# Altium PCB PCB1.PcbDoc
Units mil, origin at the board's own origin, x right, y up, seen from the top; angles counter-clockwise.
Board outline 1720 x 1130 mil, 4 copper layers (RF, GROUND, VCC, SIGNAL), stack 23.756 mil thick; 12 components, 10 nets, 55 pads, 17 vias.
Unrouted connection lines stored in the file: 18.
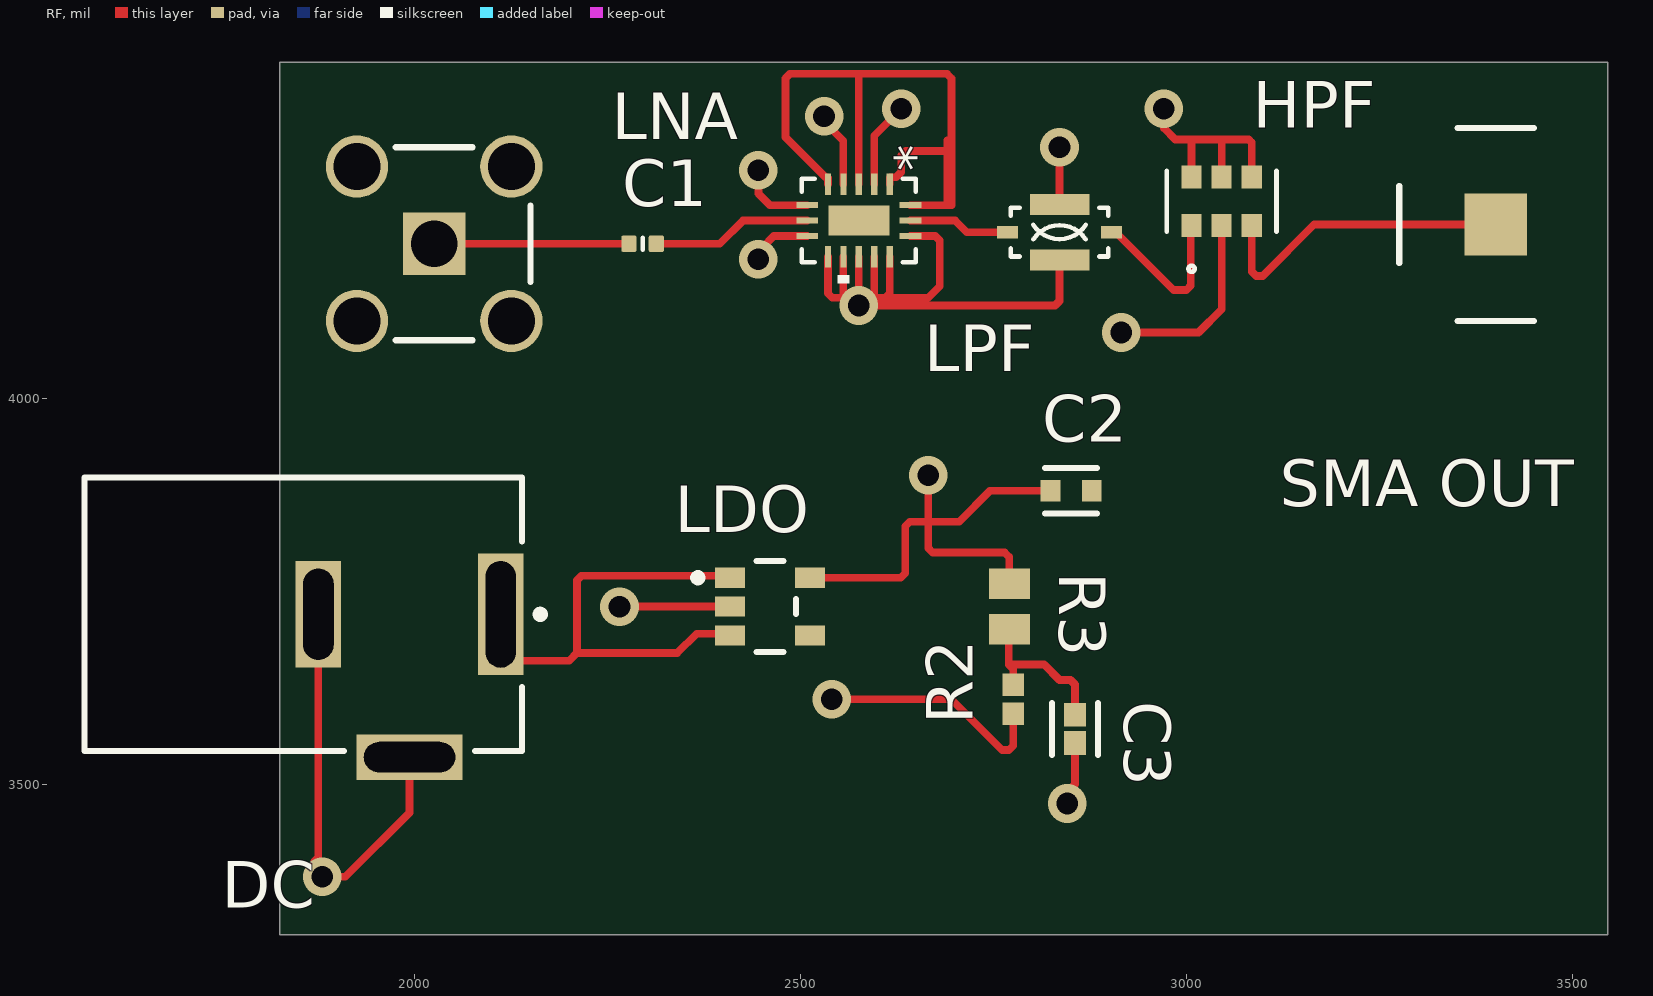
[diagram p0: RF view]
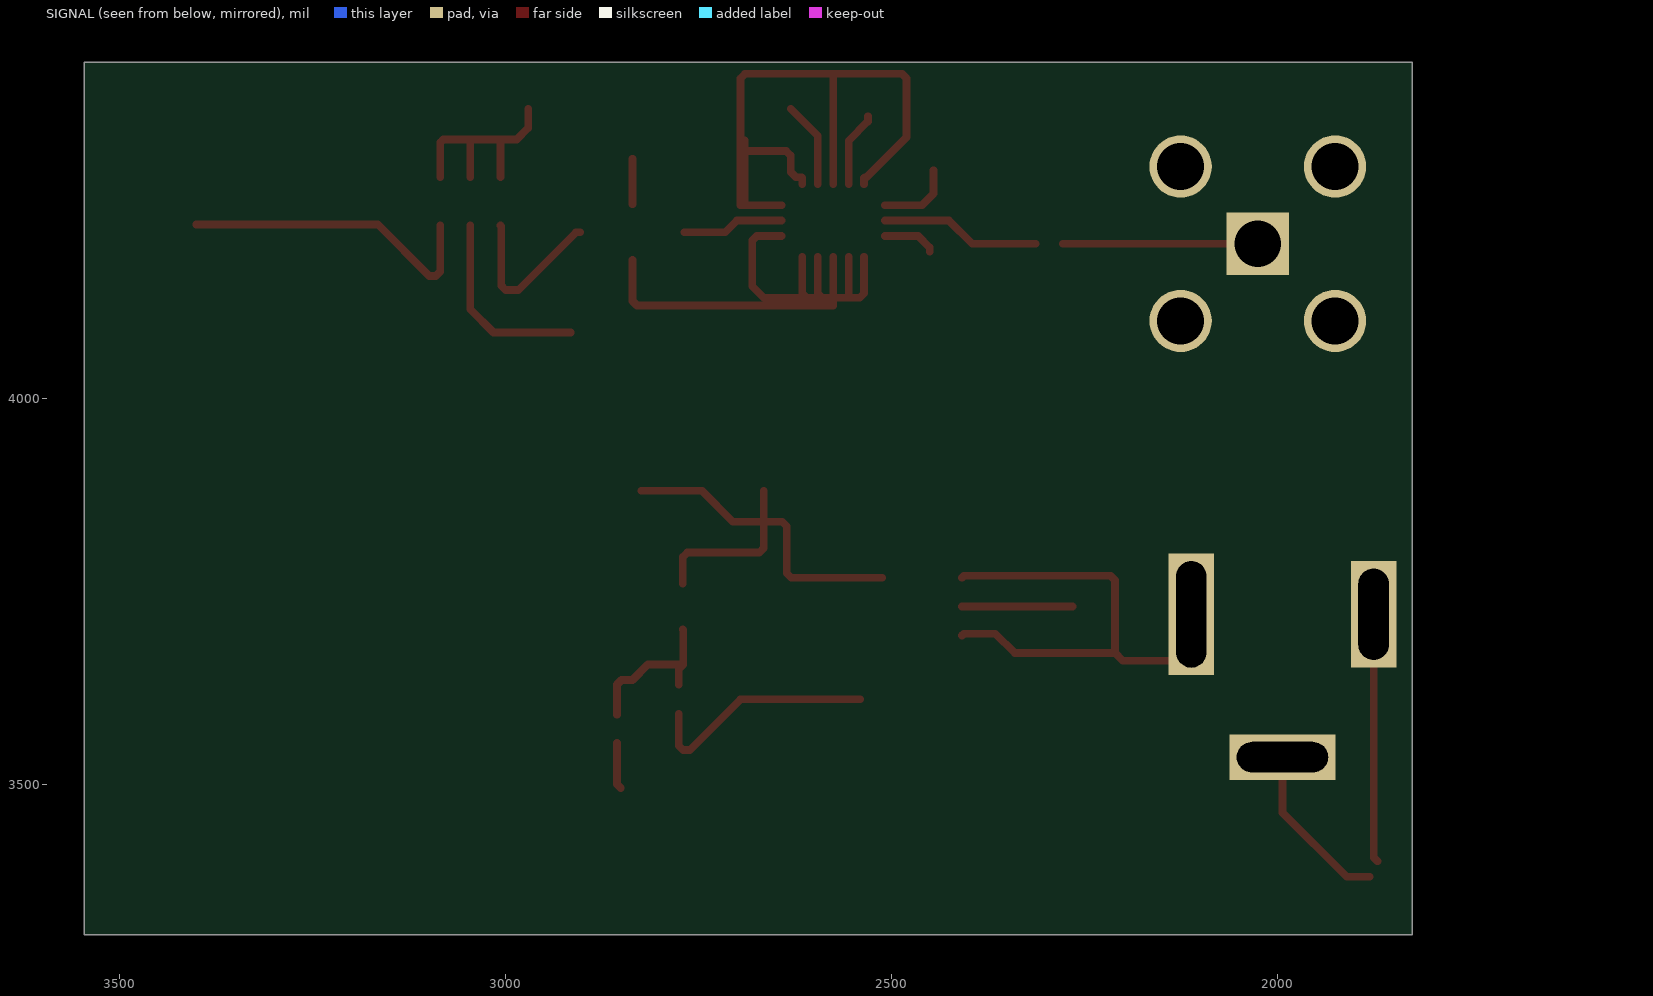
[diagram p1: SIGNAL view, seen from below]
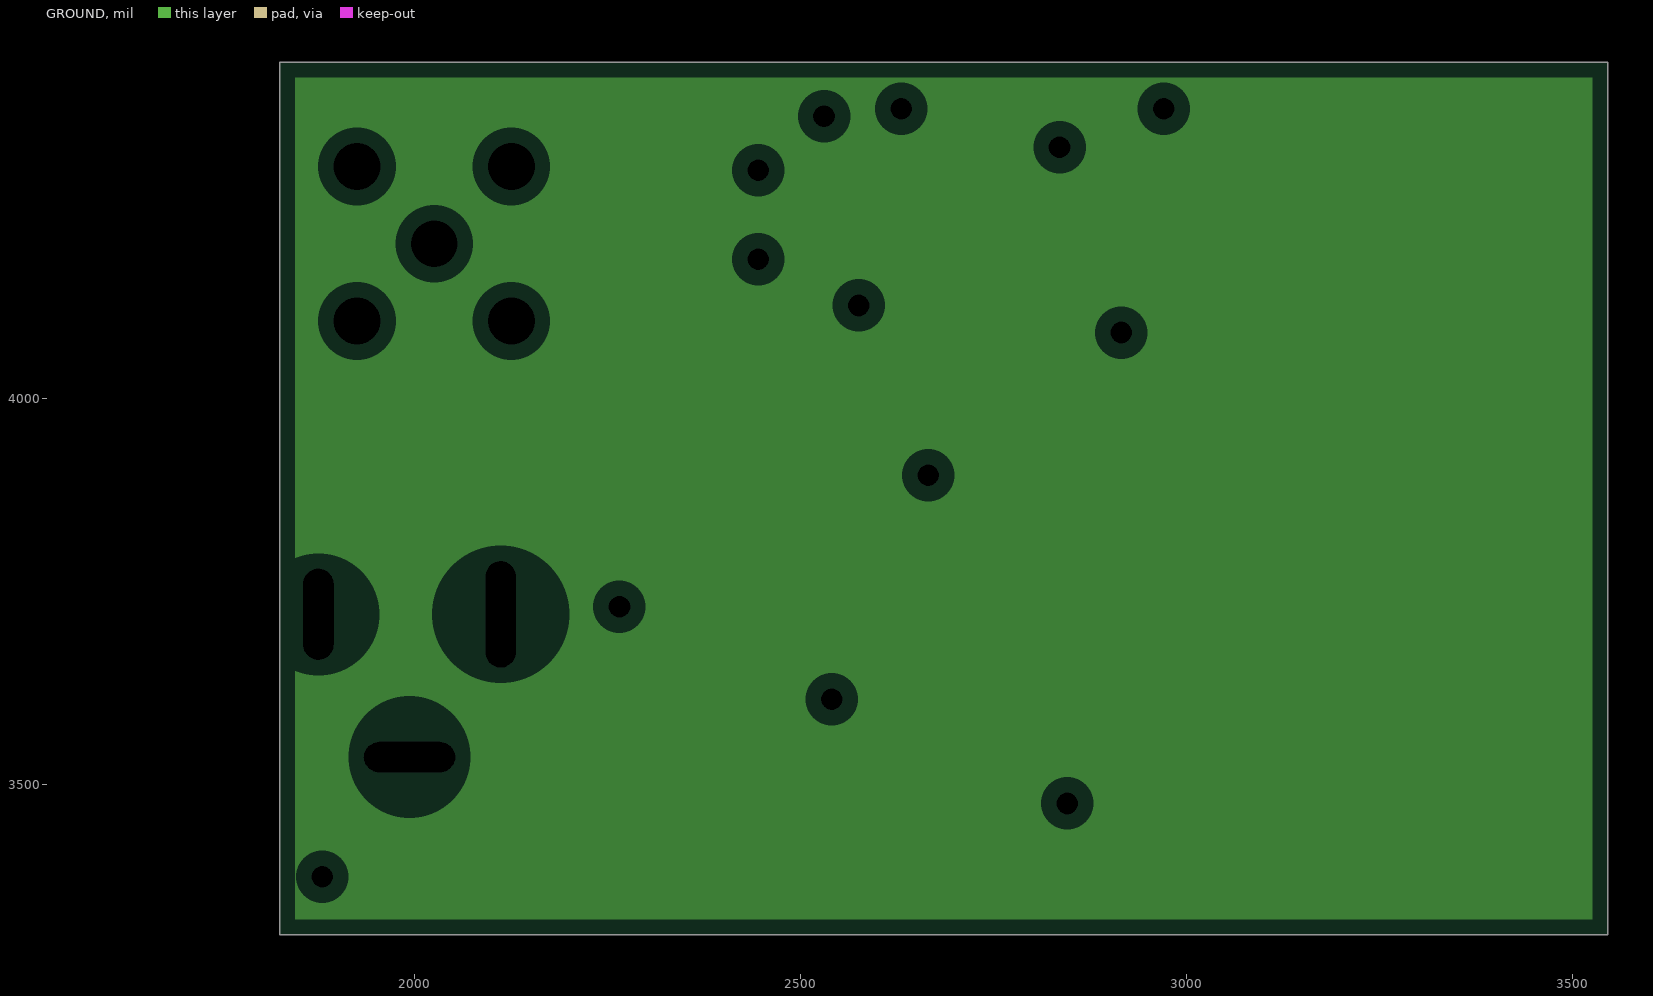
[diagram p2: GROUND, clearances drawn from the general rule]
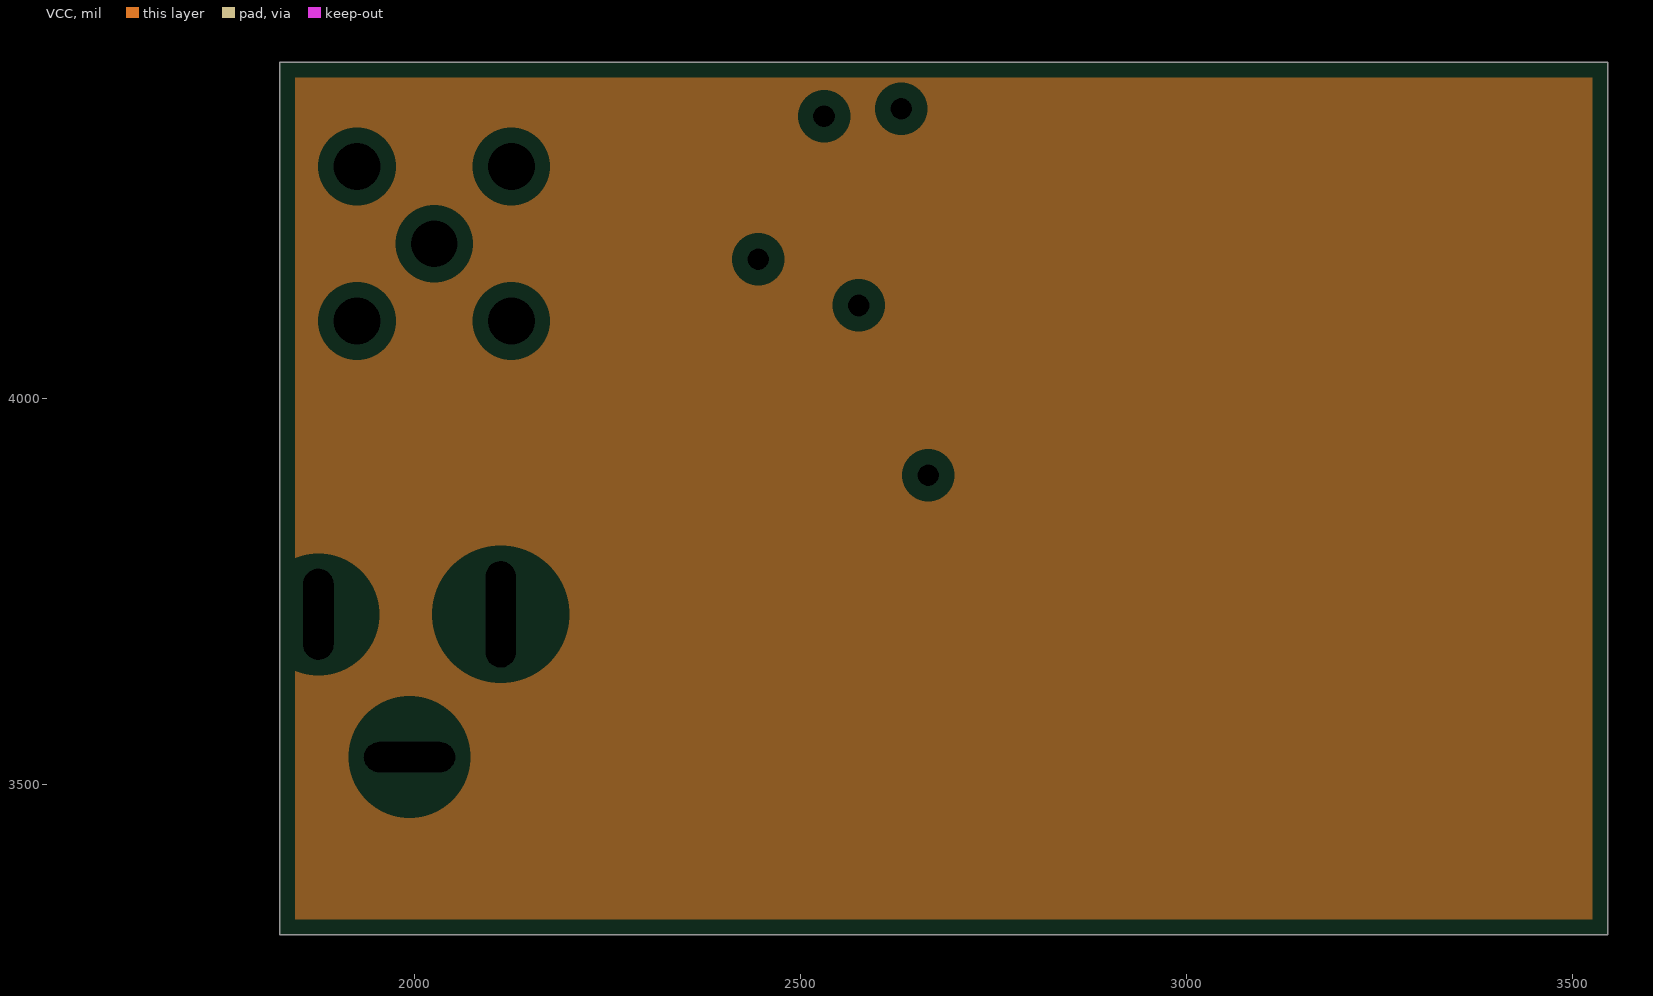
[diagram p3: VCC, clearances drawn from the general rule]
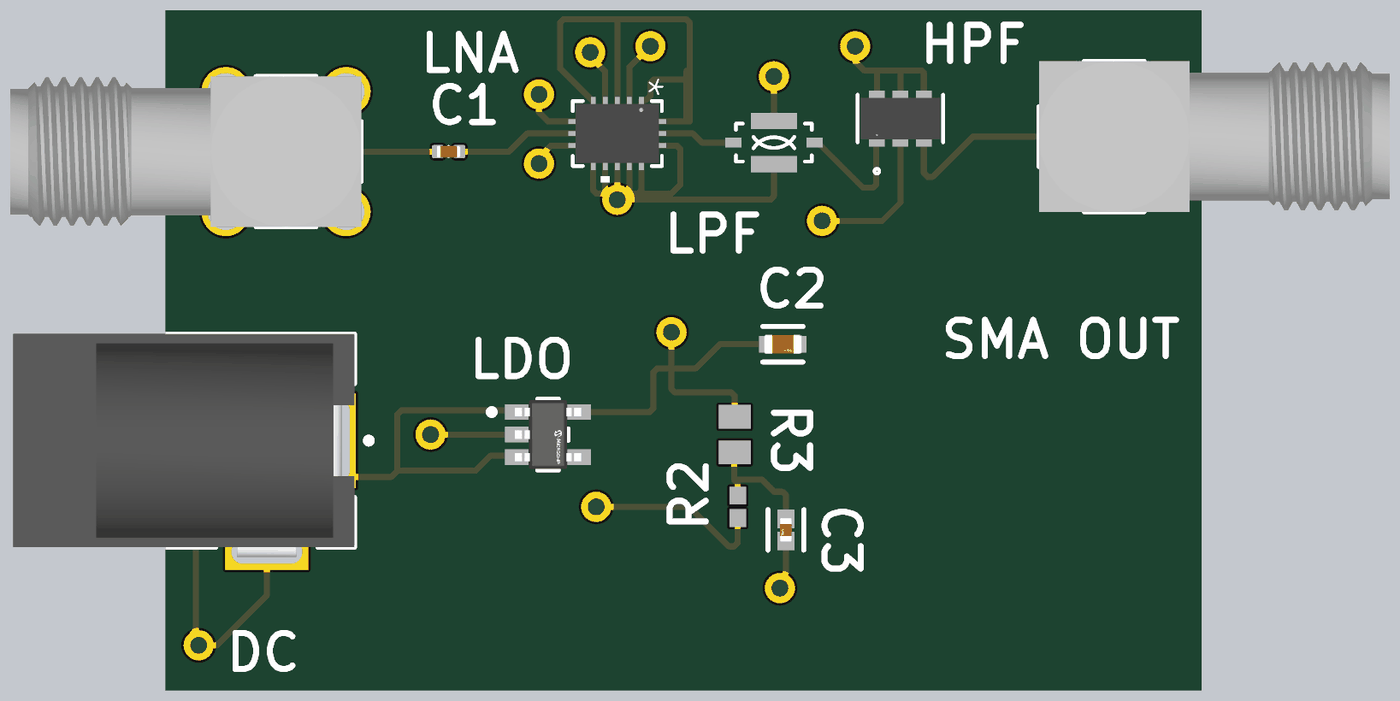
[diagram p4: 3D render of the assembled board from above, using the file's embedded part models]

## Layer stack, top to bottom
Top Solder: solder mask 0.4, Solder Resist, Dk 3.5
RF: signal copper 1.4
Dielectric 2: prepreg 2.8, PP-006, Dk 4.1
GROUND: plane copper 1.378
Dielectric 1: dielectric 12.6, FR-4, Dk 4.8
VCC: plane copper 1.378
Dielectric 3: prepreg 2.8, PP-006, Dk 4.1
SIGNAL: signal copper 1.4
Bottom Solder: solder mask 0.4, Solder Resist, Dk 3.5

## Board outline
1825,3305 3545,3305 3545,4435 1825,4435

## Design rules (kind name [scope] priority, off if disabled: settings)
Clearance [All] p1: gap=10 ignorepadtopadclearanceinfootprint=FALSE except(0: Arc-Hole Track-Hole SMDPad-Hole THPad-Hole Via-Hole Fill-Hole Poly-Hole Region-Hole Text-Hole)
PlaneClearance [All] p1: clearance=20
PlaneConnect [All] p1: planeconnectstyle=Relief reliefexpansion=20 reliefentries=4 reliefconductorwidth=10 reliefairgap=10
PolygonConnect [All] p1: connectstyle=Relief reliefconductorwidth=10 reliefentries=4 polygonreliefangle="90 Angle" airgapwidth=10
RoutingVias [All] p1: holewidth=28 width=50 viastyle="Through Hole" minholewidth=28 minwidth=50 maxholewidth=28 maxwidth=50
SolderMaskExpansion [All] p1: expansion=4 istentingtop=FALSE
Width [All] p1: maxlimit=10 minlimit=10 preferedwidth=10
28 further rules are at their usual default settings.

## Classes and differential pairs
component class Sheet1: C1 C2 C3 R2 R3 "SMA OUT" U2 U3 U4

## Components (designator, comment, footprint, x,y, rotation, side; value= is the part's Value field where it differs from the comment)
C1 "Capacitor 10nF +/-20% 50V 0402" CAPC0402(1005)60_L 2295,4200 r0 top value=10nF
C2 "2.2 uF" FP-GRM188-0_1-e0_2_0_5-MFG 2850,3880 r0 top value=2.2uF
C3 "470 pF" FP-0402-L_1_0_1-W_0_5_0_1-IPC_A 2855,3571.67 r270 top value=470pF
DC "Comment" CUI-PJ-002A_V 1993.11,3720 r180 top
HPF "Comment" FV1206-1_MNC 3045,4255 r90 top
LDO "MIC5205YM5-TR" FP-SOT23-5LD-PL-1-MFG 2460,3730 r0 top (schematic designator U4)
LNA "PMA-183PLN+" JV2579_MNC 2575,4230 r270 top (schematic designator U3)
LPF "LFCN-8400+" FV1206-4_MNC 2835,4215 r0 top (schematic designator U2)
R2 "" RESC1005X40X25ML10T10 2775,3610 r90 top
R3 "" RESC2013X60X40LL20T25 2770,3730 r270 top
"SMA OUT" "731000114" MOLX-731000114_V#1 3400,4225 r180 top
? "731000114" MOLX-731000114_V#2 2025,4200 r0 top

## Footprints (in the part's own frame and the unit in brackets; to place one, negate y for a bottom-side part, rotate by r counter-clockwise, add the part's x,y. Pads: shape width x height; smd on the part's side, far side on the other; paste and mask are expansions set on the pad)
CAPC0402(1005)60_L [mm] "Chip Capacitor, Body 1.0x0.5mm, Height 0.6mm, IPC High Density"
  rrect25% 0.5x0.55 smd: 1(-0.45,0) 2(0.45,0)
  silkscreen extent 0,-0.2 0,0.2, body extent -0.5,-0.25 0.5,0.25, height 0.6
CUI-PJ-002A_V [mm] "THD, 3-Leads, Body 14.4x9mm, Height 11mm"
  rect 1.5x4 hole 1 slot 3.5 at 90 deg: 1(-3,0)
  rect 1.5x3.5 hole 1 slot 3 at 90 deg: 2(3,0)
  rect 3.5x1.5 hole 1 slot 3 at 0 deg: 3(0,4.7)
  silkscreen extent -4.43,-4.5 10.7,4.5, body extent -3.7,-4.5 10.7,4.9, height 11
FP-0402-L_1_0_1-W_0_5_0_1-IPC_A [mil]
  rect 30.75x28.04 smd paste+0 mask+0: 1(-18.33,0) 2(18.33,0)
  silkscreen extent -34,-30 34,30, body extent -42,-22 42,22, height 10
FP-GRM188-0_1-e0_2_0_5-MFG [mm]
  rect 0.65x0.7 smd paste+0 mask+0: 1(-0.675,0) 2(0.675,0)
  silkscreen extent -0.85,-0.75 0.85,0.75, body extent -1.1,-0.55 1.1,0.55, height 0.25
FP-SOT23-5LD-PL-1-MFG [mm]
  rect 1x0.66 smd paste+0 mask+0: 1(-1.315,0.95) 2(-1.315,0) 3(-1.315,-0.95) 4(1.315,-0.95) 5(1.315,0.95)
  silkscreen extent -2.5,-1.5 0.85,1.5, body extent -1.91,-1.6 1.91,1.6, height 0.25
FV1206-1_MNC [mil]
  rect 30x26 smd paste+0 mask+0: 1(-31.5,39) 2(-31.5,0) 3(-31.5,-39) 4(31.5,-39) 5(31.5,0) 6(31.5,39)
  silkscreen extent -91,-71 40,71, body extent -34,-66 34,66, height 42
FV1206-4_MNC [mil]
  rect 27x16 smd paste+0 mask+0: 1(-67.5,0) 3(67.5,0)
  rect 77x27 smd paste+0 mask+0: 2(0,-36) 4(0,36)
  silkscreen extent -63,-32 63,32
JV2579_MNC [mil]
  rect 28x8 smd paste+0 mask+0: 1(-47,40) 2(-47,20) 3(-47,0) 4(-47,-20) 5(-47,-40) 9(47,-40) 10(47,-20) 11(47,0) 12(47,20) 13(47,40)
  rect 8x28 smd paste+0 mask+0: 6(-20,-67) 7(0,-67) 8(20,-67) 14(20,67) 15(0,67) 16(-20,67)
  rect 39x79 smd paste+0 mask+0: 17(0,0)
  silkscreen extent -54,-74 81,74, body extent -49,-69 49,69, height 33
MOLX-731000114_V#1 [mm] "Connector, 5-Leads, Body 14.8x6.35mm, Pitch 2.54mm"
  rect 2.05x2.05 smd: 1(0,0)
  round 2.05 on Plane1: 2(-2.54,2.54) 3(-2.54,-2.54) 4(2.54,-2.54) 5(2.54,2.54)
  silkscreen extent -1.26,-3.17 3.17,3.17, body extent -11.62,-3.17 3.18,3.18, height 9.57
MOLX-731000114_V#2 [mm] "Connector, 5-Leads, Body 14.8x6.35mm, Pitch 2.54mm"
  rect 2.05x2.05 hole 1.54: 1(0,0)
  round 2.05 hole 1.54: 2(-2.54,2.54) 3(-2.54,-2.54) 4(2.54,-2.54) 5(2.54,2.54)
  silkscreen extent -1.26,-3.17 3.17,3.17, body extent -11.62,-3.17 3.18,3.18, height 9.57
RESC1005X40X25ML10T10 [mm] "Chip Resistor, 2-Leads, Body 1.00x0.50mm, IPC Low Density"
  rect 0.75x0.7 smd: 1(-0.475,0) 2(0.475,0)
  body extent -0.55,-0.3 0.55,0.3, height 0.4
RESC2013X60X40LL20T25 [mm] "Chip Resistor, 2-Leads, Body 2.00x1.25mm, IPC High Density"
  rect 1x1.35 smd: 1(-0.75,0) 2(0.75,0)
  body extent -1.1,-0.72 1.1,0.72, height 0.6

## Part data
C1: library part CMP-001-00069-3, "Chip Capacitor, 10nF +/-20%, 50V, 0402, Thickness 0.6 mm", Case/Package=0402, Max Operating Temperature=85°C, Min Operating Temperature=-55°C, Tolerance=5%, Voltage Rating=50V, Mounting Technology=SMT, Pins=2
C2: library part CMP-2006-02836-2, "Chip Multilayer Ceramic Capacitors for General Purpose, 0603, 2.2uF, X7R, 15%, 10%, 10V", Capacitance=2.2uF, Case Code (Imperial)=0603, Case Code (Metric)=1608, Dielectric=X7R, Max Operating Temperature=125°C, Min Operating Temperature=-55°C, Package Quantity=1, Tolerance=10%, Voltage=10V, Case/Package=0603, Depth=0.8mm, Height=0.8mm, Lead Free="Lead Free", Length=1.6mm, Material=Ceramic, Mount="Surface Mount", Number of Pins=2, Packaging="Cut Tape", REACH SVHC="No SVHC", Termination=SMD/SMT, Thickness=0.035inch, Voltage Rating=10V, Voltage Rating (DC)=10V, Weight=7.1E-05oz, Width=0.031inch
C3: library part CMP-1034-01502-3, "General Purpose Ceramic Capacitor, 0402, 470pF, 10%, X7R, 15%, 50V", Capacitance=470pF, Case Code (Imperial)=0402, Case Code (Metric)=1005, Dielectric=X7R, Max Operating Temperature=125°C, Min Operating Temperature=-55°C, Package Quantity=10000, Tolerance=10%, Voltage=50V, Case/Package=0402, Construction=Flat, Contact Plating=Tin, Depth=0.5mm, Height=0.5mm, Lead Free="Lead Free", Length=1mm, Mount="Surface Mount", Number of Pins=2, Packaging="Tape and Reel", Radiation Hardening=No, REACH SVHC="No SVHC", RoHS Compliant=Yes, Series=-, Termination=SMD/SMT, Thickness=0.022inch, Voltage Rating=50V, Voltage Rating (DC)=50V, Width=0.5mm
LDO: library part CMP-06324-000022-1, "IC REG LIN POS ADJ 150MA SOT23-5", Dropout Voltage=165mV, Manufacturer=Microchip, Max Junction Temp=+125°C, Max Supply Voltage=16V, Min Supply Voltage=2.5V, Nominal Supply Current=80-1300uA, Output Current=150mA, Package=SOT23-5LD-PL-1, Temperature="-40°C to +125°C", Temperature Range Low=-40°C, Accuracy Percentage=1%, Automotive=No, Category=IC, ComponentLink2Description=Datasheet, ComponentLink2URL=http://ww1.microchip.com/downloads/en/DeviceDoc/20005785A.pdf, Device Class L1="Integrated Circuits (ICs)", Device Class L2="Power Management ICs", Device Class L3="Voltage Regulators - Linear", Digikey Description="IC REG LIN POS ADJ 150MA SOT23-5", Height=1.45mm, Lead Free=Yes, Manufacturer Part Number=MIC5205YM5-TR, Mouser Description="LDO Voltage Regulators 150mA 1% Low Noise LDO (Lead Free)", Number Of Outputs=1, Octopart=https://octopart.com/mic5205ym5-tr-microchip-66802135, Output Type=AdjustableProgrammable, RoHS=TRUE, Standoff Height=0mm, Temperature Range High=+125°C
LNA LPF: "No Description Available", Mfr_Name="Mini Circuits", Copyright="Copyright (C) 2024 Ultra Librarian. All rights reserved.", RefDes=RefDes, Type=DEV
  LNA: Manufacturer_Part_Number=PMA-183PLN+
  LPF: Manufacturer_Part_Number=LFCN-8400+
R2: library part CMP-2002-05819-1, Manufacturer=Panasonic, Part Number=ERA-2AEB621X
R3: library part CMP-2001-00628-1, Manufacturer=Panasonic, Part Number=ERA6AEB331V
"SMA OUT" ?: library part CMP-2000-05487-1, "SMA Right-Angle PCB Jack Receptacle, Brass Body, Gold Plated, 50 Ohm, 5-Pin THD, RoHS, Tray", Manufacturer=Molex, Package Description="5-Pin Through Hole Device, Body 14.8 x 6.35 mm, Pitch 2.54 mm", Datasheet URL=http://www.molex.com/webdocs/datasheets/pdf/en-us/0731000114_RF_COAX_CONNECTORS.pdf, Datasheet Version=09/2016, Manufacturer URL=http://www.molex.com/, Mounting Technology=ThroughHole, Package Reference=731000114, Package URL=http://www.molex.com/pdm_docs/sd/731000114_sd.pdf

## Via types
v1: diameter 50, hole 28, RF to GROUND, 12 vias
v2: diameter 50, hole 28, RF to VCC, 5 vias

## Nets (pads, with @x,y where several pads share a name; then routed paths per layer and width w, separated by ;. In a path a pad name is that pad's centre, name@x,y a point inside that pad or via, vN(x,y) a via of type N, cw(c..) or ccw(c..) an arc to the next point about the centre after c; other vN are vias at no path point)
GND: ?.2 ?.3 ?.4 ?.5 C2.2 HPF.4 HPF.5 HPF.6 LDO.2 LNA.1 LNA.3 LNA.5 LNA.6 LNA.8 LNA.9 LNA.10 LNA.11 LNA.12 LNA.13 LNA.14 LNA.16 LNA.17 LPF.2 LPF.4 | length 2439.6
  RF w10: v1(2265,3730) LDO.2 ; v1(2445,4295) 2445,4265 2460,4250 LNA.6 ; v2@2450,4190 2450,4195 2465,4210 LNA.8 ; LNA.9 2535,4135.86 2540.86,4130 v2@2555,4130 ; LNA.5 2535,4285 2534,4286 2531.86,4286 2480,4337.86 2480,4414.14 2485.86,4420 2575,4420 ; LNA.10 v2@2555,4130 ; LNA.11 v2@2575,4130 ; LNA.3 2575,4420 ; LNA.12 2595,4135.86 v2@2589.14,4130 ; LNA.13 2615,4135.86 2609.14,4130 ; LNA.1 2615,4285 2616,4286 2623.14,4286 2630,4292.86 2630,4314.14 2635.86,4320 2690,4320 ; LNA.14 2674.14,4210 2680,4204.14 2680,4145 2665,4130 2609.14,4130 ; LNA.16 2695,4250 ; 2690,4334.14 2690,4320 ; LPF.2 2835,4125.86 2829.14,4120 v2(2575,4120) v2@2575,4130 ; LPF.4 v1@2835,4310 ; v1(2970,4375) 2970,4350 2985,4335 3005,4335 ; HPF.6 3006,4334 3005,4335 ; HPF.5 3045,4335 ; HPF.4 3084,4331 3080,4335 3045,4335 ; v2@2555,4130 v2@2575,4130 ; v2@2575,4130 v2@2589.14,4130 ; 2575,4420 2689.14,4420 2695,4414.14 2695,4250 ; v2@2589.14,4130 2609.14,4130 ; 2690,4320 2690,4255 2695,4250 ; 3005,4335 3045,4335
  other v1: 1925,4100 2125,4100 1925,4300 2125,4300 2835,4325
  other v2: 2445,4180
"Net  _1": ?.1 C1.1 HPF.1 LPF.3 | length 466.3
  RF w10: ?.1 C1.1 ; LPF.3 2908,4215 2983,4140 2999.14,4140 3005,4145.86 3005,4222.5 HPF.1
NetC1_2: C1.2 LNA.7 | length 207.7
  RF w10: C1.2 2395,4200 2425,4230 LNA.7
NetC3_2: LDO.4
NetJ2_1: DC.1 LDO.1 LDO.3 | length 654.4
  RF w10: DC.1 2111.22,3684.28 2135.75,3659.75 2199.75,3659.75 2210,3670 ; LDO.3 2405.83,3695 2365,3695 2340,3670 2210,3670 ; LDO.1 2405.63,3770 2215.86,3770 2210,3764.14 2210,3670
"NetSMA OUT_1": 
NetU1_1: 
NetU2_1: LNA.15 LPF.1 | length 131.7
  RF w10: LNA.15 2700,4230 2715,4215 LPF.1
Power: "SMA OUT.1" C2.1 C3.1 C3.2 HPF.3 LDO.5 R2.1 R2.2 R3.1 R3.2 | length 1594.9
  RF w10: LDO.5 2629.14,3767.4 2635,3773.26 2635,3834.14 2640.86,3840 2665,3840 ; v1(2540,3610) 2695,3610 2760.86,3544.14 2769.14,3544.14 2775,3550 R2.1 ; v2@2665,3880 2665,3840 ; R3.2 2769.14,3699.61 2769.14,3655 ; R3.1 2770,3794.14 2764.14,3800 2670.86,3800 2665,3805.86 2665,3840 ; R2.2 2775,3649.14 2769.14,3655 ; C2.1 2745,3880 2705,3840 2665,3840 ; v1@2850,3495 2855,3500 C3.2 ; C3.1 2855,3629.14 2849.14,3635 2835,3635 2815,3655 2769.14,3655 ; HPF.3 3084,4164 3089.86,4158.14 3098.14,4158.14 3165,4225 3400,4225
  other v1: 2845,3475
  other v2: 2665,3900
VCC: LNA.2 LNA.4 | length 210.9
  RF w10: v2(2530,4365) 2530,4358.43 2555,4333.43 LNA.4 ; LNA.2 2595,4340 v2(2630,4375)
pads on no net: "SMA OUT.2" "SMA OUT.3" "SMA OUT.4" "SMA OUT.5" DC.2 DC.3 HPF.2
copper on no net: | length 792.4
  RF w10: v1@1870,3400 1875,3405 1875,3720 ; v1(1880,3380) 1910,3380 1993.11,3463.11 1993.11,3534.96 ; v1(2915,4085) 3015,4085 3045,4115 3045,4223.5

## Polygon pours and split planes (outlines as drawn)
no net on GROUND (split plane): 3524.9,3325.1 1845.1,3325.1 1845.1,4414.9 3524.9,4414.9
no net on VCC (split plane): 3524.9,3325.1 1845.1,3325.1 1845.1,4414.9 3524.9,4414.9

## Text inside footprints (layer, text, board x,y; h text height)
LNA: Top Overlay "*" at 2600,4328.5 h50 r270; Mechanical 13 "*" at 2600,4275.5 h50 r270